# Altium PCB Bending_Machine_PCB.PcbDoc
Units mil, origin at the board's own origin, x right, y up, seen from the top; angles counter-clockwise.
Board outline 3510.03 x 2210.03 mil, 2 copper layers (Top Layer, Bottom Layer); 18 components, 25 nets, 114 pads, 6 vias.
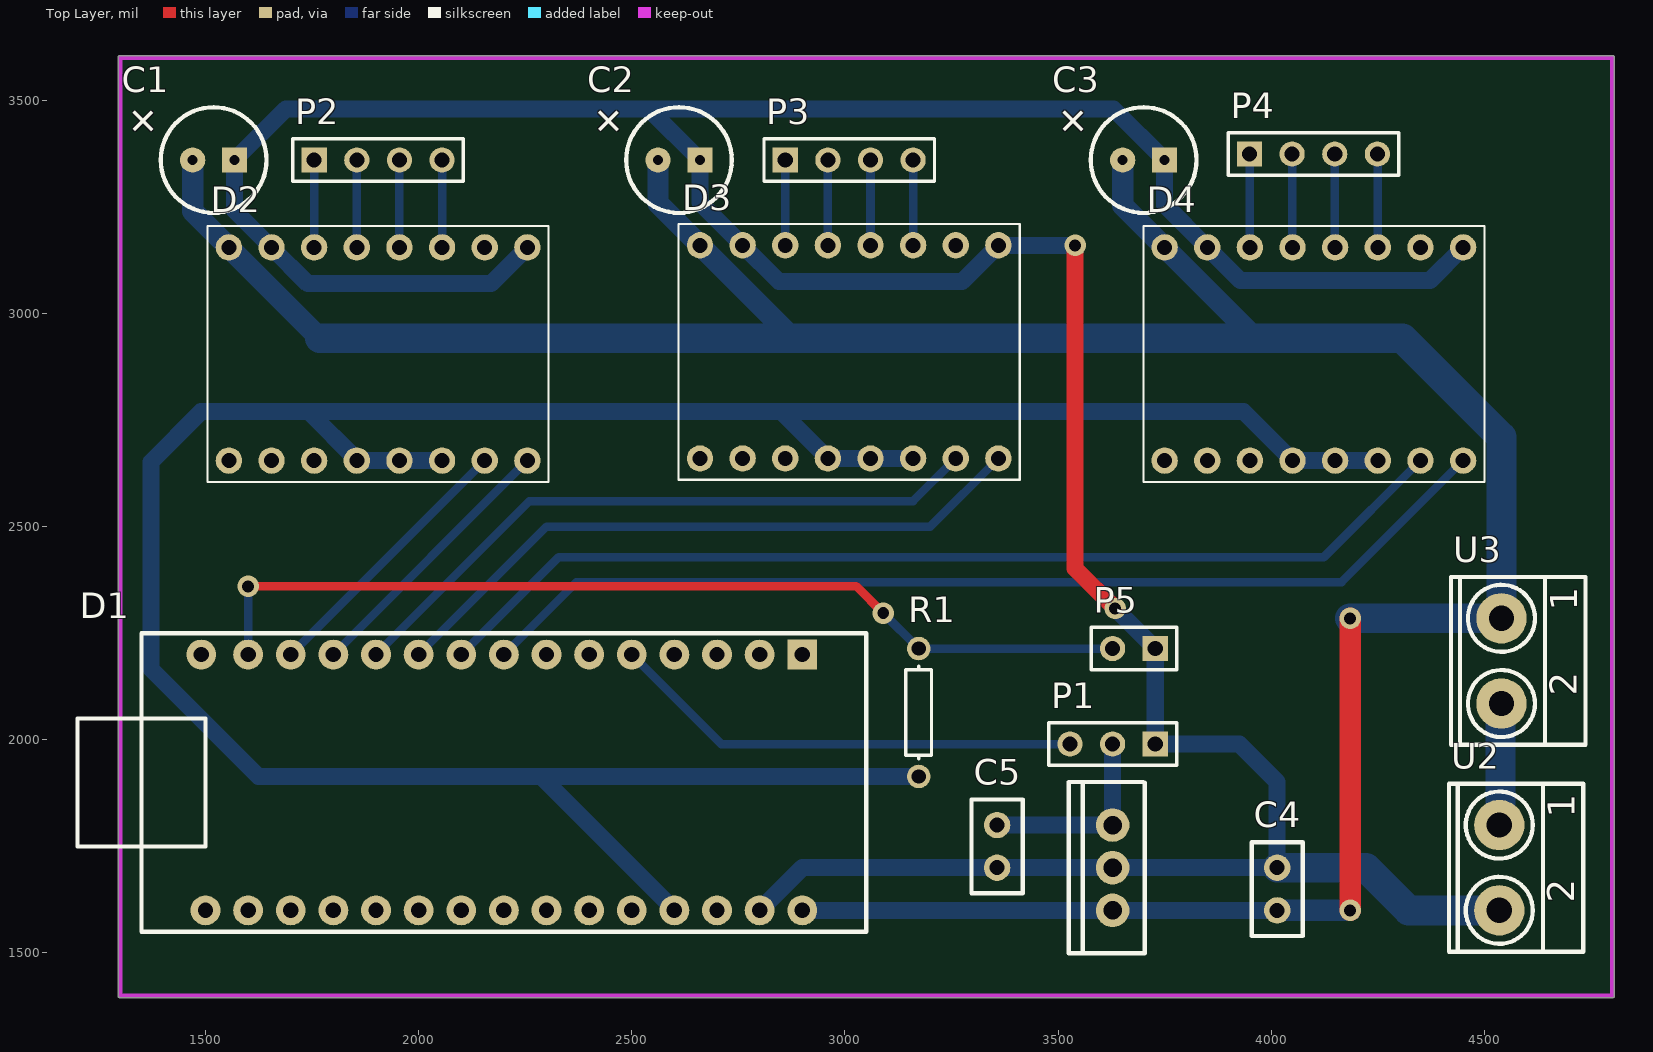
[diagram p0: Top Layer view]
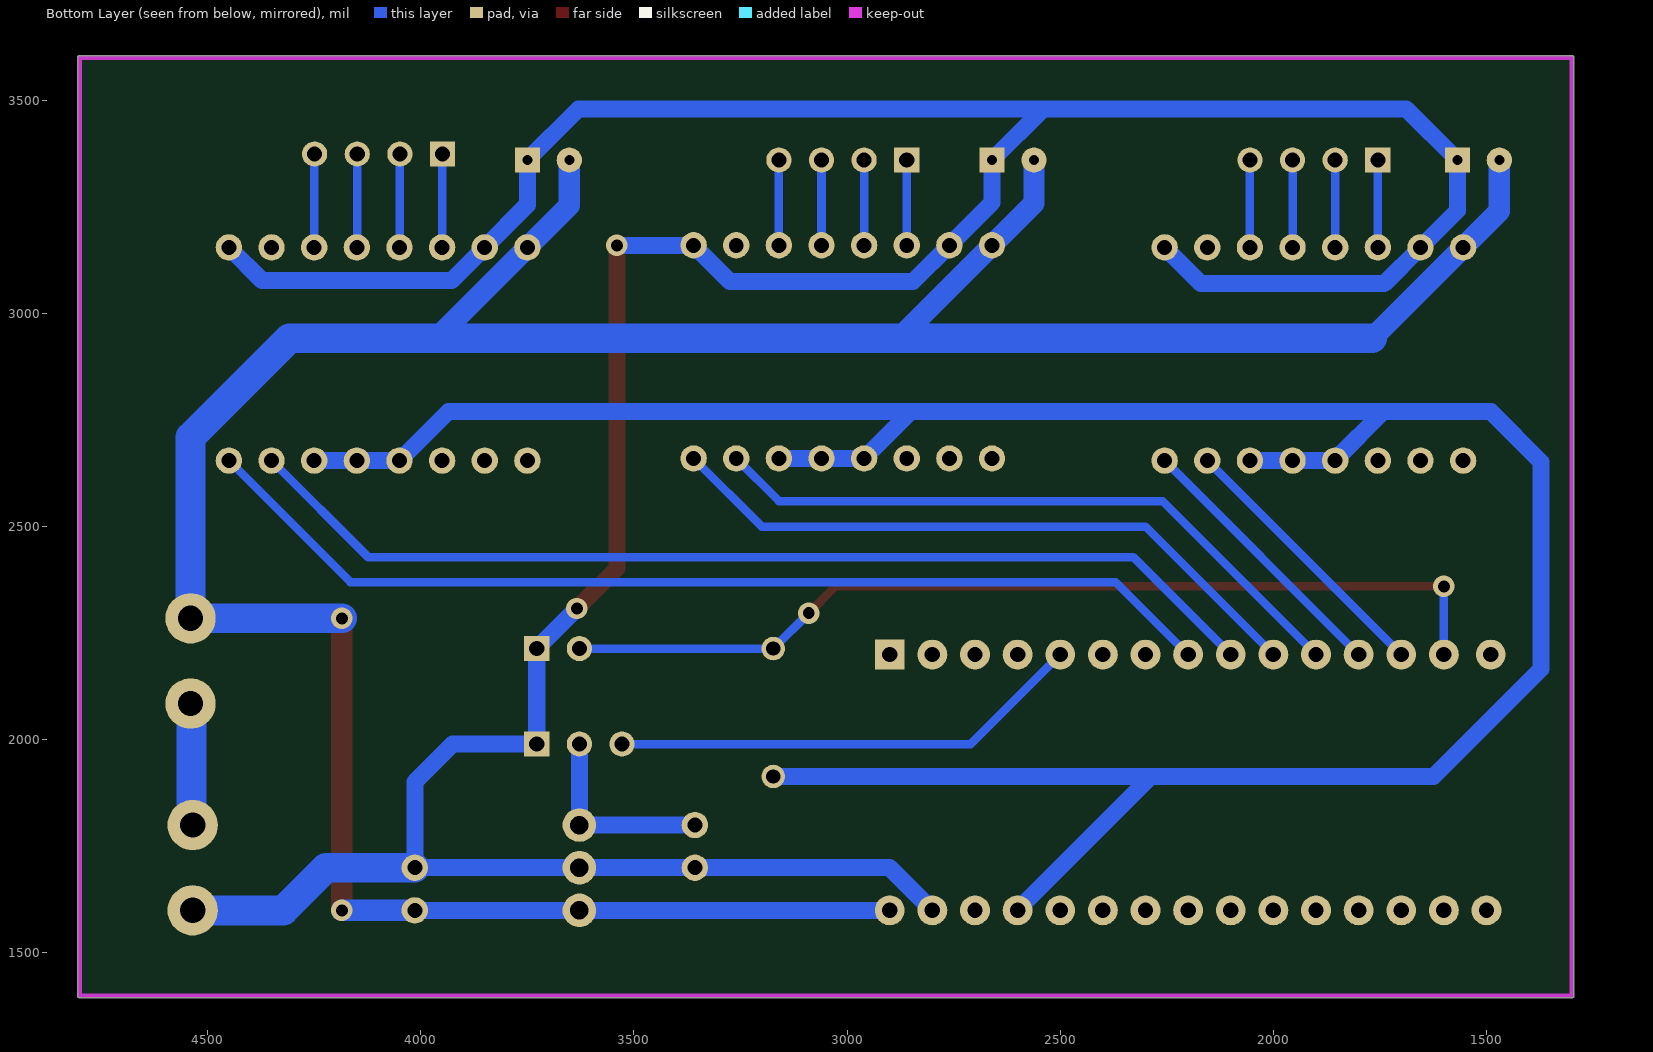
[diagram p1: Bottom Layer view, seen from below]

## Layer stack, top to bottom
Top Solder: solder mask 0.4, Solder Resist, Dk 3.5
Top Layer: signal copper 1.4
Dielectric 1: dielectric 12.6, FR-4, Dk 4.8
Bottom Layer: signal copper 1.4
Bottom Solder: solder mask 0.4, Solder Resist, Dk 3.5

## Board outline
1300,1394.98 cw(c1300,1400) 1294.98,1400 1294.98,3600 cw(c1300,3600) 1300,3605.01 4800,3605.01 cw(c4800,3600) 4805.02,3600 4805.02,1400 cw(c4800,1400) 4800,1394.98

## Design rules (kind name [scope] priority, off if disabled: settings)
Clearance [All] p1: gap=10 ignorepadtopadclearanceinfootprint=FALSE except(0: Arc-Hole Track-Hole SMDPad-Hole THPad-Hole Via-Hole Fill-Hole Poly-Hole Region-Hole Text-Hole)
PolygonConnect [All] p1: connectstyle=Relief reliefconductorwidth=10 reliefentries=4 polygonreliefangle="90 Angle" airgapwidth=10
RoutingVias [All] p1: holewidth=28 width=50 viastyle="Through Hole" minholewidth=28 minwidth=50 maxholewidth=28 maxwidth=50
SolderMaskExpansion [All] p1: expansion=4 istentingtop=FALSE
Width [All] p1: maxlimit=70 minlimit=7 preferedwidth=20 minimp=50.000000 maximp=50.000000 favimp=50.000000
30 further rules are at their usual default settings.

## Classes and differential pairs
component class Bending_Machine_SCH: C2 C3 C4 C5 D1 D3 D4 P1 P2 P3 P4 P5 R1 U2 U3

## Components (designator, comment, footprint, x,y, rotation, side; value= is the part's Value field where it differs from the comment)
C1 "Cap Pol1" Cap_100uF 1255,3355 r0 top value=100uF
C2 "Cap Pol1" Cap_100uF 2346.6,3355 r0 top value=100uF
C3 "Cap Pol1" Cap_100uF 3436.6,3355 r0 top value=100uF
C4 "Cap Pol1" Cap_0.47uF 4199,1650 r180 top value=0.47uF
C5 "Cap Pol1" Cap_0.47uF 3171.95,1750 r0 top value=0.47uF
D1 "Arduino" Arduino 561.79,1969.78 r0 top
D2 "DRV8825" DRV8825 505,2695 r0 top
D3 "DRV8825" DRV8825 1610,2700 r0 top
D4 "DRV8825" DRV8825 2700,2695 r0 top
P1 "Header 3" HDR1X3 3727.95,1990 r180 top
P2 "NEMA23" HDR1X4 1755,3360 r0 top
P3 "NEMA17" HDR1X4 2860,3360 r0 top
P4 "NEMA17" HDR1X4 3949,3374 r0 top
P5 "Header 2" HDR1X2 3727.95,2213.95 r180 top
R1 "Res1" AXIAL-0.3 3173,2063.95 r90 top value=1K
U1 "LM7805" LM7805 3627.95,1970 r270 top
U2 "Terminal_Block" "terminal block" 4282.4,1619.5 r0 top
U3 "Terminal_Block" "terminal block" 4287.4,2104.5 r0 top

## Footprints (in the part's own frame and the unit in brackets; to place one, negate y for a bottom-side part, rotate by r counter-clockwise, add the part's x,y. Pads: shape width x height; smd on the part's side, far side on the other; paste and mask are expansions set on the pad)
Arduino [mil]
  rect 70x70 hole 36 paste+0 mask+2: 1(2338.21,230.22)
  round 70 hole 36 paste+0 mask+2: 2(2238.21,230.22) 3(2138.21,230.22) 4(2038.21,230.22) 5(1938.21,230.22) 6(1838.21,230.22) 7(1738.21,230.22) 8(1638.21,230.22) 9(1538.21,230.22) 10(1438.21,230.22) 11(1338.21,230.22) 12(1238.21,230.22) 13(1138.21,230.22) 14(1038.21,230.22) 15(928.21,230.22) 16(938.21,-369.78) 17(1038.21,-369.78) 18(1138.21,-369.78) 19(1238.21,-369.78) 20(1338.21,-369.78) 21(1438.21,-369.78) 22(1538.21,-369.78) 23(1638.21,-369.78) 24(1738.21,-369.78) 25(1838.21,-369.78) 26(1938.21,-369.78) 27(2038.21,-369.78) 28(2138.21,-369.78) 29(2238.21,-369.78)
  round 70 hole 35.98 paste+0 mask+2: 30(2338.21,-369.78)
  silkscreen extent 638,-420 2488,280
AXIAL-0.3 [mm] "Axial Device, Thru-Hole; 2 Leads; 0.3 in Pin Spacing"
  round 1.4 hole 0.85: 1(-3.81,0) 2(3.81,0)
  silkscreen extent -2.77,-0.76 2.77,0.76
Cap_0.47uF [mm]
  round 1.57 hole 0.89 paste+0 mask+0.051: 1(4.699,1.27) 2(4.699,-1.27)
  silkscreen extent 3.17,-2.79 6.22,2.79
Cap_100uF [mm]
  round 1.5 hole 0.6 paste+0 mask+0.051: 1(5.461,0.127)
  rect 1.5x1.5 hole 0.6 paste+0 mask+0.051: 2(7.96,0.127)
  silkscreen extent 3.56,-3.02 9.86,3.28
DRV8825 [mm]
  round 1.57 hole 0.89 paste+0 mask+0.051: 1(26.67,-1.016) 2(29.21,-1.016) 3(31.75,-1.016) 4(34.29,-1.016) 5(36.83,-1.016) 6(39.37,-1.016) 7(41.91,-1.016) 8(44.45,-1.016) 9(44.45,11.684) 10(41.91,11.684) 11(39.37,11.684) 12(36.83,11.684) 13(34.29,11.684) 14(31.75,11.684) 15(29.21,11.684) 16(26.67,11.684)
  silkscreen extent 25.4,-2.29 45.72,12.95
HDR1X2 [mm] "Connector; Header; 2 Position"
  rect 1.5x1.5 hole 0.9: 1(0,0)
  round 1.5 hole 0.9: 2(2.54,0)
  silkscreen extent -1.27,-1.27 3.81,1.27
HDR1X3 [mm] "Connector; Header; 3 Position"
  rect 1.5x1.5 hole 0.9: 1(0,0)
  round 1.5 hole 0.9: 2(2.54,0) 3(5.08,0)
  silkscreen extent -1.27,-1.27 6.35,1.27
HDR1X4 [mm] "Connector; Header; 4 Position"
  rect 1.5x1.5 hole 0.9: 1(0,0)
  round 1.5 hole 0.9: 2(2.54,0) 3(5.08,0) 4(7.62,0)
  silkscreen extent -1.27,-1.27 8.89,1.27
LM7805 [mm]
  round 2 hole 1.1 paste+0 mask+0.051: 1(9.398,0) 2(6.858,0) 3(4.318,0)
  silkscreen extent 1.76,-2.62 11.96,1.91
"terminal block" [mm]
  round 3 hole 1.5 paste+0 mask+0.051: 1(6.416,4.585) 2(6.416,-0.495)
  silkscreen extent 3.42,-2.96 11.42,7.04

## Part data
C1 C2 C3 C4 C5: "Polarized Capacitor (Radial)", LatestRevisionDate=17-Jul-2002, LatestRevisionNote="Re-released for DXP Platform.", PackageDescription="Polarized Capacitor (Radial); 2 Leads", PackageReference=RB7.6-15, Published=8-Jun-2000, Publisher="Altium Limited"
P1: "Header, 3-Pin", LatestRevisionDate=17-Jul-2002, LatestRevisionNote="Re-released for DXP Platform.", Publisher="Altium Limited"
P2 P3 P4: library part "Header 4", "Header, 4-Pin", LatestRevisionDate=17-Jul-2002, LatestRevisionNote="Re-released for DXP Platform.", Publisher="Altium Limited"
P5: "Header, 2-Pin", LatestRevisionDate=17-Jul-2002, LatestRevisionNote="Re-released for DXP Platform.", Publisher="Altium Limited"
R1: "Resistor", LatestRevisionDate=17-Jul-2002, LatestRevisionNote="Re-released for DXP Platform.", PackageDescription="Axial Device, Thru-Hole; 2 Leads; 0.3 in Pin Spacing", PackageReference=AXIAL-0.3, Published=8-Jun-2000, Publisher="Altium Limited"
U2 U3: library part "Terminal Block"

## Via types
v1: diameter 50, hole 28, Top Layer to Bottom Layer, 6 vias

## Nets (pads, with @x,y where several pads share a name; then routed paths per layer and width w, separated by ;. In a path a pad name is that pad's centre, name@x,y a point inside that pad or via, vN(x,y) a via of type N, cw(c..) or ccw(c..) an arc to the next point about the centre after c; other vN are vias at no path point)
+12: U2.1 U3.2 | length 287.1
  Bottom Layer w70: U2.1 4537.5,1802.5 4537.5,2082.5 U3.2
Arduino_+5V: D1.27 D2.4 D2.5 D2.6 D3.4 D3.5 D3.6 D4.4 D4.5 D4.6 R1.1 | length 6526.5
  Bottom Layer w20: D1.27 D1.27@2600,1600.95 ; 2851,2769 2851,2770
  Bottom Layer w40: D2.6 D2.5 D2.4 1855,2657 1742,2770 ; D1.27@2600,1600.95 2287,1913.95 ; 2851,2769 D3.4 D3.5 D3.6 ; R1.1 2287,1913.95 ; D4.6 D4.5 D4.4 3935,2770 2851,2770 1742,2770 ; 1742,2770 1490,2770 1372,2652 1372,2166 1624.05,1913.95 2287,1913.95
DIR_Bender: D1.12 D2.8 | length 643.5
  Bottom Layer w20: D1.12 D2.8
DIR_Feeder: D1.8 D4.8 | length 2438.5
  Bottom Layer w20: D1.8 2370,2370 4165,2370 D4.8
DIR_Z_Axis: D1.10 D3.8 | length 1550.5
  Bottom Layer w20: D1.10 2300,2500 3200,2500 D3.8
GND: C1.2 C2.2 C3.2 C4.2 C5.2 D1.29 D2.9 D2.15 D3.9 D3.15 D4.9 D4.15 P1.1 P5.1 U1.2 U2.2 | length 8954.5
  Top Layer w40: v1(3540,3160) 3540,2401.91 v1(3633.98,2307.93)
  Bottom Layer w40: D2.9 2170,3070 1740,3070 D2.15 1568.4,3241.6 C1.2 1688.4,3480 2540,3480 ; D1.29 2900,1700 C5.2 U1.2 C4.2 4014,1901 3925,1990 P1.1 P5.1 v1(3633.98,2307.93) ; v1(3540,3160) D3.9 3275,3075 2845,3075 D3.15 2660,3260 C2.2 2540,3480 ; D4.9 4372,3077 3928,3077 D4.15 3750,3255 C3.2 3630,3480 2540,3480
  Bottom Layer w70: C4.2 4222,1700 4322,1600 U2.2
MG996R_D2: D1.5 P1.3 | length 1115.5
  Bottom Layer w20: D1.5 2710,1990 P1.3 P1.3@3527.53,1990.43
NetC5_1: C5.1 P1.2 U1.3 | length 461
  Bottom Layer w40: C5.1 U1.3 P1.2
NetD2_11: D2.11 P2.4 | length 205
  Bottom Layer w20: D2.11 P2.4
NetD2_12: D2.12 P2.3 | length 205
  Bottom Layer w20: D2.12 P2.3
NetD2_13: D2.13 P2.2 | length 205
  Bottom Layer w20: D2.13 P2.2
NetD2_14: D2.14 P2.1 | length 205
  Bottom Layer w20: D2.14 P2.1
NetD3_11: D3.11 P3.4 | length 200
  Bottom Layer w20: D3.11 P3.4
NetD3_12: D3.12 P3.3 | length 200
  Bottom Layer w20: D3.12 P3.3
NetD3_13: D3.13 P3.2 | length 200
  Bottom Layer w20: D3.13 P3.2
NetD3_14: D3.14 P3.1 | length 200
  Bottom Layer w20: D3.14 P3.1
NetD4_11: D4.11 P4.4 | length 219.4
  Bottom Layer w20: P4.4 4249.5,3373.5 4249.5,3155.5 D4.11
NetD4_12: D4.12 P4.3 | length 219.4
  Bottom Layer w20: P4.3 4149.5,3373.5 4149.5,3155.5 D4.12
NetD4_13: D4.13 P4.2 | length 219.4
  Bottom Layer w20: P4.2 4049.5,3373.5 4049.5,3155.5 D4.13
NetD4_14: D4.14 P4.1 | length 219.4
  Bottom Layer w20: P4.1 3949.5,3373.5 3949.5,3155.5 D4.14
STP_Bender: D1.13 D2.7 | length 643.5
  Bottom Layer w20: D1.13 D2.7
STP_Feeder: D1.9 D4.7 | length 2438.5
  Bottom Layer w20: D1.9 2328.28,2428.28 4123.28,2428.28 D4.7
STP_Z_Axis: D1.11 D3.7 | length 1550.5
  Bottom Layer w20: D1.11 2260,2560 3160,2560 D3.7
SW_12V: C1.1 C2.1 C3.1 C4.1 D1.30 D2.16 D3.16 D4.16 U1.1 U3.1 | length 7255.6
  Top Layer w50: v1(4185,1600) v1(4185,2285)
  Bottom Layer w40: D1.30 U1.1 C4.1
  Bottom Layer w50: C1.1 1470,3240 1768,2942 ; C2.1 2561.6,3258.4 D3.16 2878,2942 ; C3.1 3651.6,3253.4 D4.16 3963,2942 ; C4.1 v1(4185,1600)
  Bottom Layer w70: 1768,2942 2878,2942 3963,2942 4308,2942 4540,2710 U3.1 v1(4185,2285)
Switch: D1.14 P5.2 R1.2 | length 2249.2
  Top Layer w20: v1(1600,2360) 3026.95,2360 v1(3089.95,2297)
  Bottom Layer w20: D1.14 v1(1600,2360) ; v1(3089.95,2297) R1.2 P5.2 P5.2@3627.43,2214.48
pads on no net: D1.1 D1.2 D1.3 D1.4 D1.6 D1.7 D1.15 D1.16 D1.17 D1.18 D1.19 D1.20 D1.21 D1.22 D1.23 D1.24 D1.25 D1.26 D1.28 D2.1 D2.2 D2.3 D2.10 D3.1 D3.2 D3.3 D3.10 D4.1 D4.2 D4.3 D4.10

## Keep-outs
Keep-Out Layer:
  lines w10: 1300,1400 1300,3600 4700,3600 4800,3600 4800,1400 1300,1400

## Text inside footprints (layer, text, board x,y; h text height)
C1: Top Overlay "+" at 1347.35,3400.65 h70.87 r45
C2: Top Overlay "+" at 2438.95,3400.65 h70.87 r45
C3: Top Overlay "+" at 3528.95,3400.65 h70.87 r45
U2: Top Overlay "2" at 4711.2,1618.1 h62.99 r90; Top Overlay "1" at 4712.5,1817.7 h62.99 r90
U3: Top Overlay "2" at 4716.2,2103.1 h62.99 r90; Top Overlay "1" at 4717.5,2302.7 h62.99 r90